# Altium PCB PCB3.PcbDoc
Units mm, origin at the board's own origin, x right, y up, seen from the top; angles counter-clockwise.
Board outline 84.33 x 83.06 mm, 2 copper layers (Top Layer, Bottom Layer); 15 components, 21 nets, 99 pads, 6 vias.
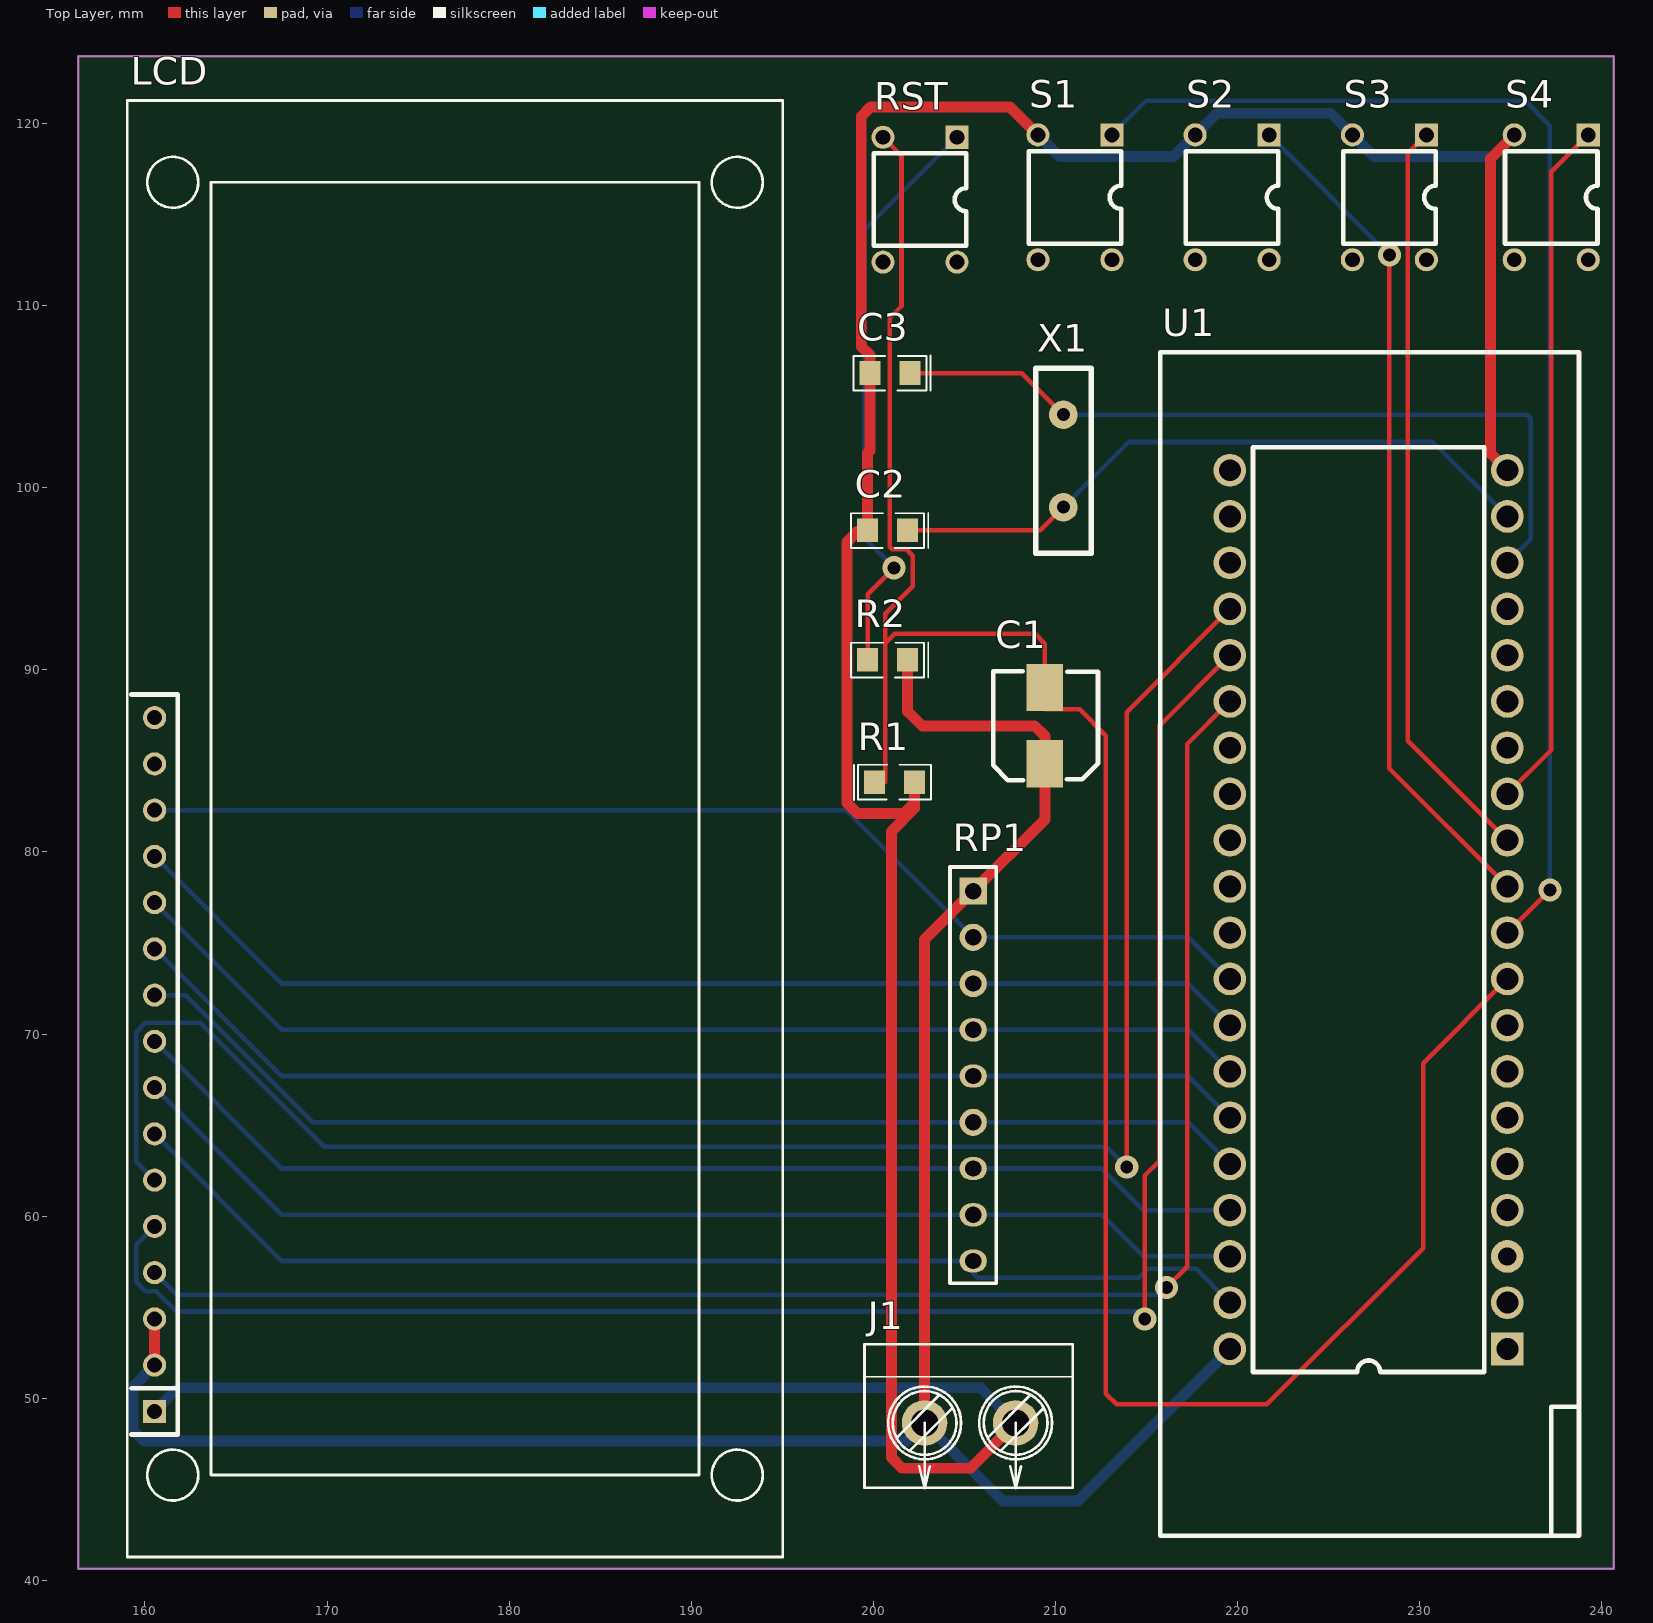
[diagram p0: Top Layer view]
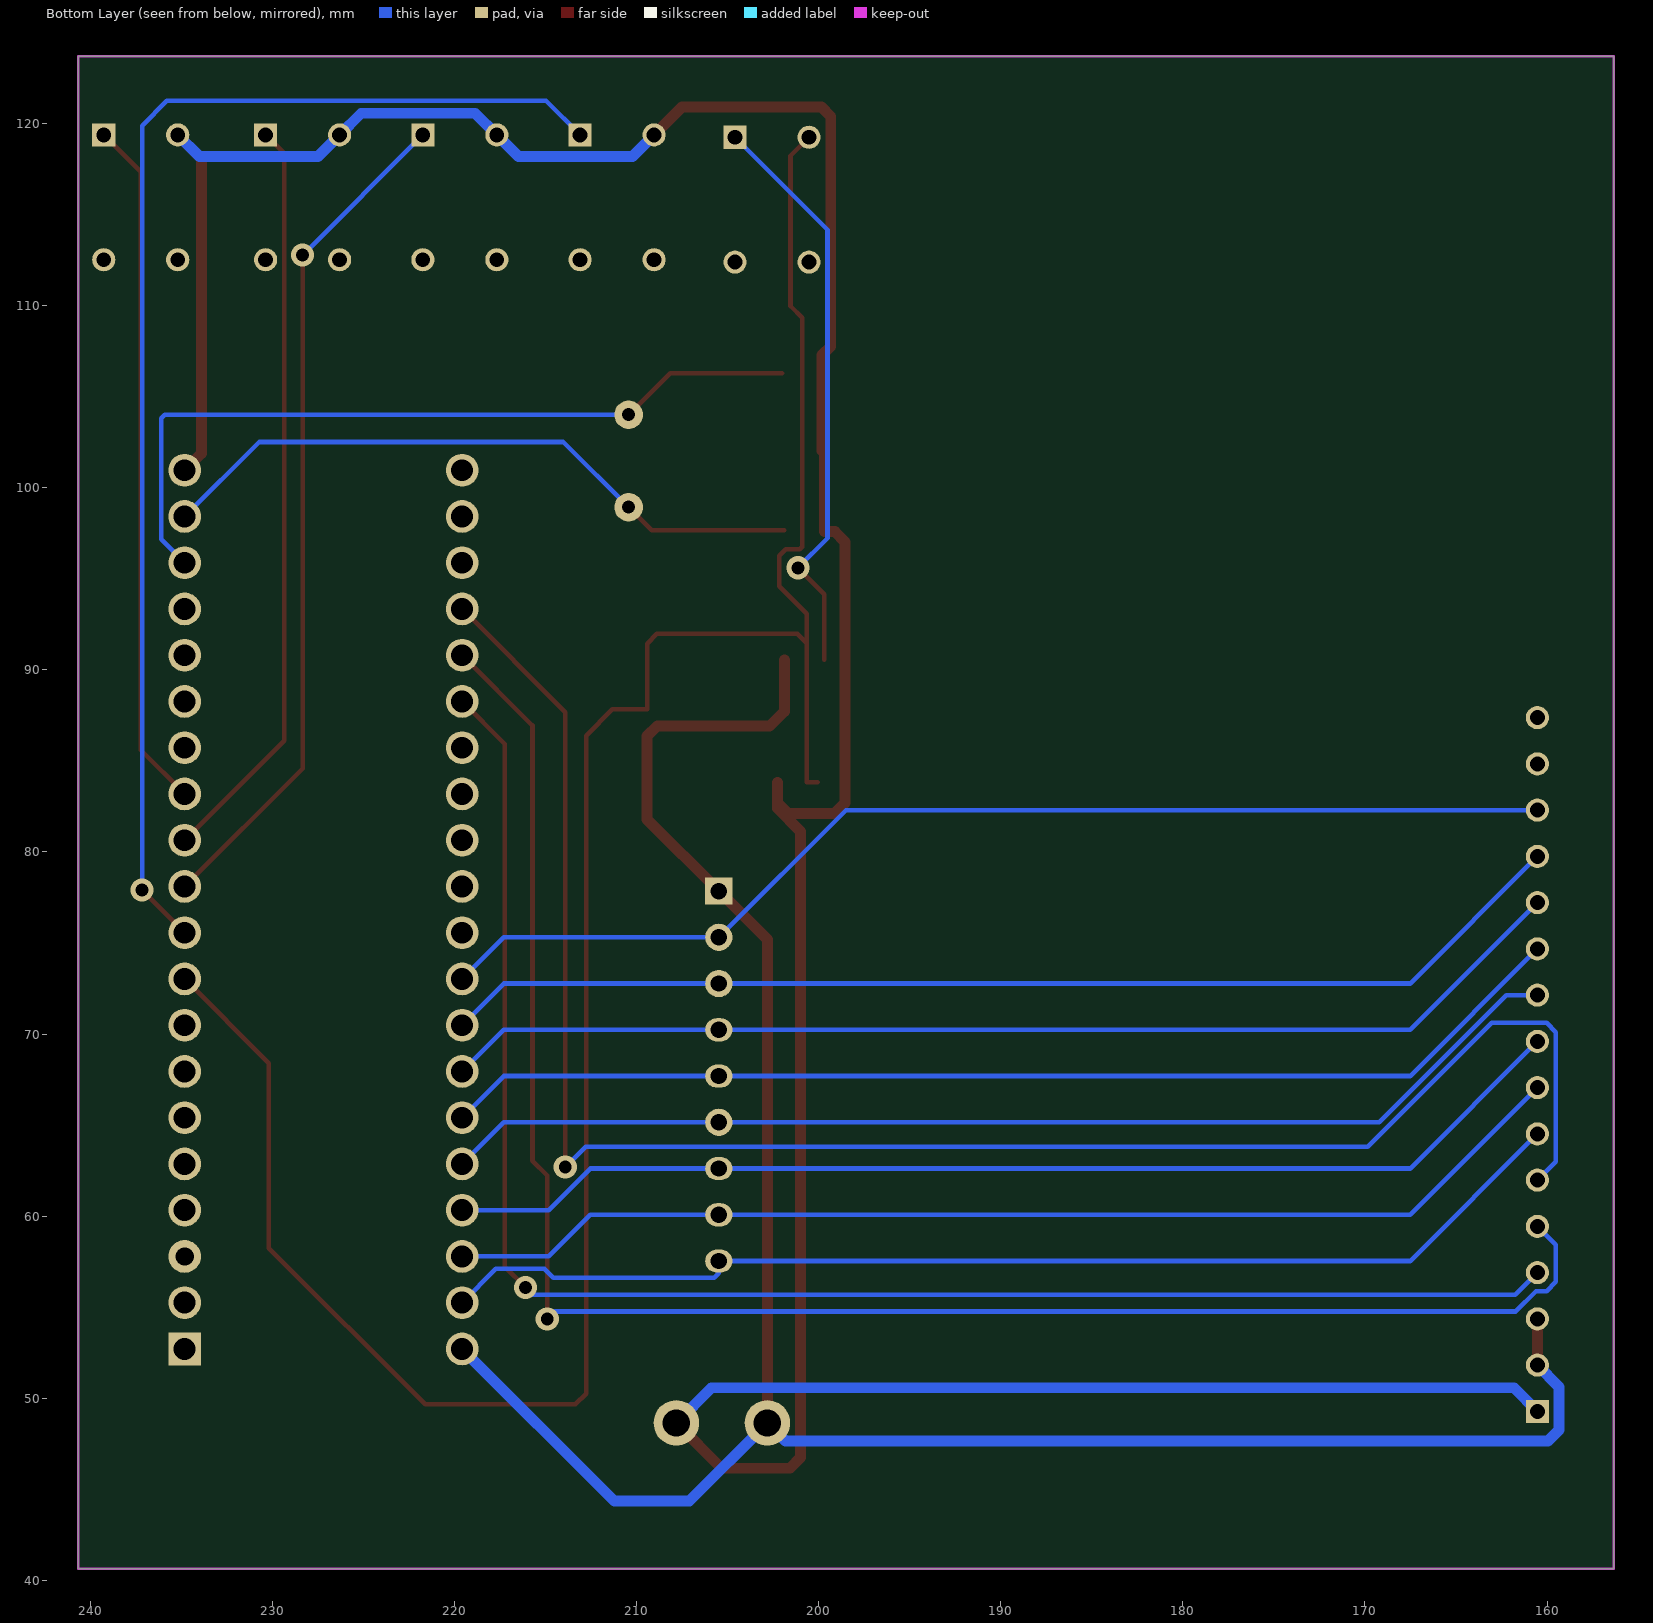
[diagram p1: Bottom Layer view, seen from below]
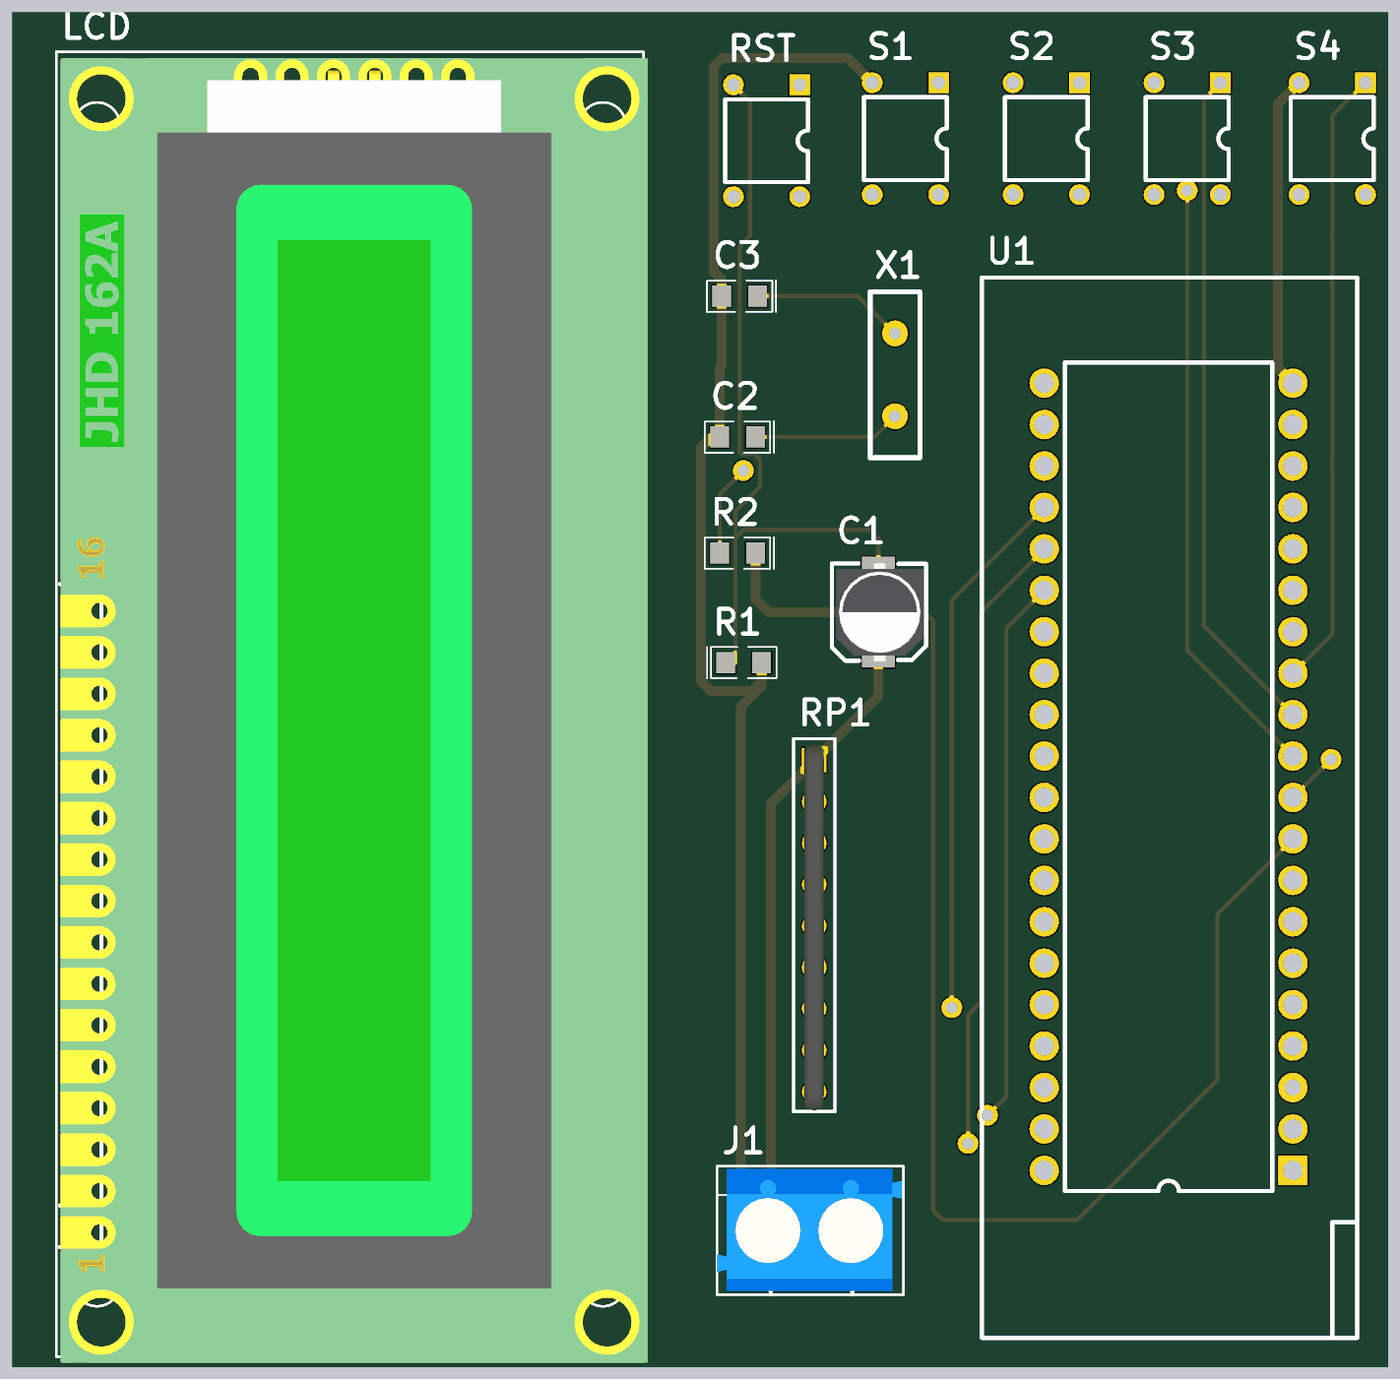
[diagram p2: 3D render of the assembled board from above, using the file's embedded part models]

## Layer stack, top to bottom
Top Solder: solder mask 0.0102, Solder Resist, Dk 3.5
Top Layer: signal copper 0.0356
Dielectric 1: dielectric 0.32, FR-4, Dk 4.8
Bottom Layer: signal copper 0.0356
Bottom Solder: solder mask 0.0102, Solder Resist, Dk 3.5

## Board outline
156.337,40.64 156.337,123.698 240.665,123.698 240.665,40.64

## Design rules (kind name [scope] priority, off if disabled: settings)
Clearance [All] p1: gap=0.254
PolygonConnect [All] p1: connectstyle=Relief reliefconductorwidth=0.254 reliefentries=4 polygonreliefangle="90 Angle" airgapwidth=0.254
RoutingVias [All] p1: holewidth=0.711 width=1.27 viastyle="Through Hole" minholewidth=0.711 minwidth=1.27 maxholewidth=0.711 maxwidth=1.27
SolderMaskExpansion [All] p1: expansion=0.102
Width Width_1 [InNetClass('New Class 1')] p1: maxlimit=0.254 minlimit=0.254 preferedwidth=0.254
Width [InNetClass('New Class')] p2: maxlimit=0.6 minlimit=0.254 preferedwidth=0.6
29 further rules are at their usual default settings.

## Classes and differential pairs
net class "New Class": GND VCC
net class "New Class 1": D0 D1 D2 D3 D4 D5 D6 D7 EN NetC1_2 NetC2_1 NetC3_1 NetR2_2 P30 P31 P32 P33 RS WR

## Components (designator, comment, footprint, x,y, rotation, side; value= is the part's Value field where it differs from the comment)
C1 "10uf" C_SMT-5*5 209.423,84.836 r90 top
C2 "30" C0805 200.787,97.663 r180 top
C3 "30" C0805 200.914,106.299 r180 top
J1 "CON2" TC2 202.819,48.641 r0 top
LCD "1602" LCD1602 160.528,49.276 r90 top
R1 "10K" C0805 201.168,83.82 r0 top
R2 "10K" C0805 200.787,90.551 r180 top
RP1 "103" R-9PIN 205.486,77.851 r270 top
RST "SW-PB" ANJIAN 205.105,115.824 r270 top
S1 "SW-PB" ANJIAN 213.614,115.951 r270 top
S2 "SW-PB" ANJIAN 222.25,115.951 r270 top
S3 "SW-PB" ANJIAN 230.886,115.951 r270 top
S4 "SW-PB" ANJIAN 239.776,115.951 r270 top
U1 "AT89C52" JINSUOZUO 238.76,107.442 r180 top
X1 "12MHz" XTAL1 210.439,98.933 r90 top

## Footprints (in the part's own frame and the unit in brackets; to place one, negate y for a bottom-side part, rotate by r counter-clockwise, add the part's x,y. Pads: shape width x height; smd on the part's side, far side on the other; paste and mask are expansions set on the pad)
ANJIAN [mil]
  rect 50x50 hole 32: 1(-135,-20)
  round 50 hole 32: 2(-135,-180) 3(135,-180) 4(135,-20)
  silkscreen extent -100,-200 100,0
C0805 [mm]
  rect 1.15x1.3 smd: 1(-1.1,0) 2(1.1,0)
  silkscreen extent -2.24,-0.97 2.01,0.97, body extent -0.97,-0.61 1.03,0.6, height 0.5
C_SMT-5*5 [mm] "贴片铝电解电容 5*5   22uf"
  rect 2.6x2 smd: 1(0,0) 2(4.191,0)
  silkscreen extent -0.89,-2.92 5.08,2.84, body extent -0.92,-2.73 5.08,2.57, height 5.9
JINSUOZUO [mm]
  rect 1.8x1.8 hole 1.2: 1(3.937,54.737)
  round 1.8 hole 1.2: 2(3.937,52.197) 4(3.937,47.117) 5(3.937,44.577) 6(3.937,42.037) 7(3.937,39.497) 8(3.937,36.957) 9(3.937,34.417) 10(3.937,31.877) 11(3.937,29.337) 12(3.937,26.797) 13(3.937,24.257) 14(3.937,21.717) 15(3.937,19.177) 16(3.937,16.637) 17(3.937,14.097) 18(3.937,11.557) 19(3.937,9.017) 20(3.937,6.477) 21(19.177,6.477) 22(19.177,9.017) 23(19.177,11.557) 24(19.177,14.097) 25(19.177,16.637) 26(19.177,19.177) 27(19.177,21.717) 28(19.177,24.257) 29(19.177,26.797) 30(19.177,29.337) 31(19.177,31.877) 32(19.177,34.417) 33(19.177,36.957) 34(19.177,39.497) 35(19.177,42.037) 36(19.177,44.577) 37(19.177,47.117) 38(19.177,49.657) 39(19.177,52.197) 40(19.177,54.737)
  round 1.8 hole 1: 3(3.937,49.657)
  silkscreen extent 0,0 23,65
LCD1602 [mil]
  rect 50x50 hole 32: 1(0,0)
  round 50 hole 32: 2(100,0) 3(200,0) 4(300,0) 5(400,0) 6(500,0) 7(600,0) 8(700,0) 9(800,0) 10(900,0) 11(1000,0) 12(1100,0) 13(1200,0) 14(1300,0) 15(1400,0) 16(1500,0)
  silkscreen extent -315,-1358 2835,59, body extent -330,-1369 2820,49, height 417
R-9PIN [mm]
  rect 1.5x1.5 hole 0.9: 1(0,0)
  round 1.5 hole 0.9: 2(2.54,0) 3(5.08,0) 6(12.7,0)
  oval 1.27x1.5 hole 0.9: 4(7.62,0) 5(10.16,0) 7(15.24,0) 8(17.78,0) 9(20.32,0)
  silkscreen extent -1.32,-1.27 21.54,1.27, body extent -1.01,-0.63 21.49,0.61, height 5.3
TC2 [mm] "2头接线端子（5.08）"
  round 2.5 hole 1.5: 1(0,0) 2(5,0)
  silkscreen extent -3.3,-3.59 8.13,4.32, body extent -3.31,-3.33 8.05,4.17, height 10.25
XTAL1 [mil]
  round 62 hole 28: 1(0,0) 2(200,0)
  silkscreen extent -100,-60 300,60

## Part data
C1: library part 电解电容, "Capacitor"
C2 C3: library part CAP, "Capacitor"
J1: "Connector"
LCD: library part LCM1602
R1 R2: library part RES2
RP1: library part RP8
U1: library part AT89C51, "8-Bit Microcontroller with 4K Flash ROM"
X1: library part CRYSTAL, "Crystal"

## Via types
v1: diameter 1.27, hole 0.711, Top Layer to Bottom Layer, 6 vias

## Nets (pads, with @x,y where several pads share a name; then routed paths per layer and width w, separated by ;. In a path a pad name is that pad's centre, name@x,y a point inside that pad or via, vN(x,y) a via of type N, cw(c..) or ccw(c..) an arc to the next point about the centre after c; other vN are vias at no path point)
D0: LCD.7 RP1.9 U1.39 | length 63.7
  Bottom Layer w0.254: LCD.7 167.513,57.531 RP1.9 205.486,56.87 205.74,56.616 214.579,56.616 215.063,57.099 217.729,57.099 U1.39
D1: LCD.8 RP1.8 U1.38 | length 62.9
  Bottom Layer w0.254: LCD.8 167.513,60.071 RP1.8 212.547,60.071 214.833,57.785 U1.38
D2: LCD.9 RP1.7 U1.37 | length 62.9
  Bottom Layer w0.254: LCD.9 167.513,62.611 RP1.7 212.547,62.611 214.833,60.325 U1.37
D3: LCD.10 RP1.6 U1.36 | length 62.9
  Bottom Layer w0.254: LCD.10 162.23,72.136 169.215,65.151 RP1.6 217.297,65.151 U1.36
D4: LCD.11 RP1.5 U1.35 | length 62.9
  Bottom Layer w0.254: LCD.11 167.513,67.691 RP1.5 217.297,67.691 U1.35
D5: LCD.12 RP1.4 U1.34 | length 62.9
  Bottom Layer w0.254: LCD.12 167.513,70.231 RP1.4 217.297,70.231 U1.34
D6: LCD.13 RP1.3 U1.33 | length 62.9
  Bottom Layer w0.254: LCD.13 167.513,72.771 RP1.3 217.297,72.771 U1.33
D7: LCD.14 RP1.2 U1.32 | length 62.9
  Bottom Layer w0.254: LCD.14 198.501,82.296 RP1.2 217.297,75.311 U1.32
EN: LCD.6 U1.24 | length 99.5
  Top Layer w0.254: v1(213.919,62.687) 213.919,87.681 U1.24
  Bottom Layer w0.254: LCD.6 159.512,62.992 159.512,70.104 160.02,70.612 163.035,70.612 169.843,63.805 212.801,63.805 v1(213.919,62.687)
GND: C2.2 C3.2 J1.2 LCD.1 R1.2 S1.2 S2.2 S3.2 S4.2 U1.20 | length 196.3
  Top Layer w0.6: R1.2 202.268,82.693 ; J1.2 205.33,46.152 201.574,46.152 200.99,46.736 200.99,81.12 202.268,82.398 202.268,82.693 ; S1.2 207.518,120.904 199.847,120.904 199.339,120.396 199.339,107.764 199.814,107.29 C3.2 199.814,102.032 199.687,101.905 C2.2 199.687,97.587 199.111,97.587 198.552,97.028 198.552,82.685 199.136,82.101 201.676,82.101 202.268,82.693 ; U1.20 233.909,101.879 233.909,118.085 S4.2
  Bottom Layer w0.6: LCD.1 161.823,50.571 205.889,50.571 J1.2 ; S1.2 210.236,118.186 216.484,118.186 S2.2 218.867,120.569 225.125,120.569 S3.2 227.508,118.186 234.01,118.186 S4.2
NetC1_2: C1.2 R1.1 RST.2 U1.9 | length 129.1
  Top Layer w0.254: R1.1 200.66,83.82 200.66,91.465 ; RST.2 201.549,118.237 201.549,109.982 200.914,109.347 200.914,96.751 201.041,96.624 201.801,96.624 202.159,96.266 202.159,94.59 200.66,93.091 200.66,91.465 ; U1.9 230.2,68.402 230.2,58.242 221.615,49.657 213.36,49.657 212.776,50.241 212.776,86.385 211.328,87.833 209.423,87.833 C1.2 209.423,91.44 208.89,91.973 201.168,91.973 200.66,91.465
NetC2_1: C2.1 U1.19 X1.1 | length 36.6
  Top Layer w0.254: C2.1 209.169,97.663 X1.1
  Bottom Layer w0.254: X1.1 214.02,102.514 230.734,102.514 U1.19
NetC3_1: C3.1 U1.18 X1.2 | length 43.6
  Top Layer w0.254: C3.1 208.153,106.299 X1.2
  Bottom Layer w0.254: X1.2 235.915,104.013 236.118,103.81 236.118,97.18 U1.18
NetR2_2: R2.2 RST.1 | length 32.1
  Top Layer w0.254: R2.2 199.687,94.15 v1(201.143,95.606)
  Bottom Layer w0.254: v1(201.143,95.606) 199.517,97.231 199.517,114.173 RST.1
P30: S1.1 U1.10 | length 70.7
  Top Layer w0.254: U1.10 v1(237.16,77.902)
  Bottom Layer w0.254: S1.1 214.976,121.25 235.798,121.25 237.16,119.888 v1(237.16,77.902)
P31: S2.1 U1.11 | length 46.7
  Top Layer w0.254: v1(228.346,112.776) 228.346,84.582 U1.11
  Bottom Layer w0.254: S2.1 v1(228.346,112.776)
P32: S3.1 U1.12 | length 41.4
  Top Layer w0.254: S3.1 229.362,118.364 229.362,86.106 U1.12
P33: S4.1 U1.13 | length 38
  Top Layer w0.254: U1.13 237.236,85.598 237.236,117.348 S4.1
RS: LCD.4 U1.26 | length 89.9
  Top Layer w0.254: v1(216.103,56.083) 217.246,57.226 217.246,85.928 U1.26
  Bottom Layer w0.254: LCD.4 161.747,55.677 215.697,55.677 v1(216.103,56.083)
VCC: C1.1 J1.1 LCD.2 LCD.3 R2.1 RP1.1 U1.40 | length 124.1
  Top Layer w0.6: LCD.2 LCD.3 ; R2.1 201.887,87.724 202.692,86.919 208.864,86.919 209.423,86.36 C1.1 209.423,81.788 RP1.1 202.819,75.184 J1.1
  Bottom Layer w0.6: LCD.2 159.334,50.622 159.334,48.26 159.944,47.65 201.828,47.65 J1.1 207.112,44.348 211.226,44.348 U1.40
WR: LCD.5 U1.25 | length 98.1
  Top Layer w0.254: v1(214.909,54.356) 214.909,62.23 215.722,63.043 215.722,86.944 U1.25
  Bottom Layer w0.254: LCD.5 159.512,58.42 159.512,56.388 160.02,55.88 160.604,55.88 161.722,54.762 214.503,54.762 v1(214.909,54.356)
pads on no net: LCD.15 LCD.16 RST.3 RST.4 S1.3 S1.4 S2.3 S2.4 S3.3 S3.4 S4.3 S4.4 U1.1 U1.2 U1.3 U1.4 U1.5 U1.6 U1.7 U1.8 U1.14 U1.15 U1.16 U1.17 U1.21 U1.22 U1.23 U1.27 U1.28 U1.29 U1.30 U1.31

## Keep-outs
Keep-Out Layer:
  the board outline again, w0.132